# Altium PCB PCB_编码器小板_2025-08-08.pcbdoc
Units mil, origin at the board's own origin, x right, y up, seen from the top; angles counter-clockwise.
Board outline 1520 x 1535 mil, 2 copper layers (Top Layer, Bottom Layer); 4 components, 11 nets, 16 pads, 6 vias.
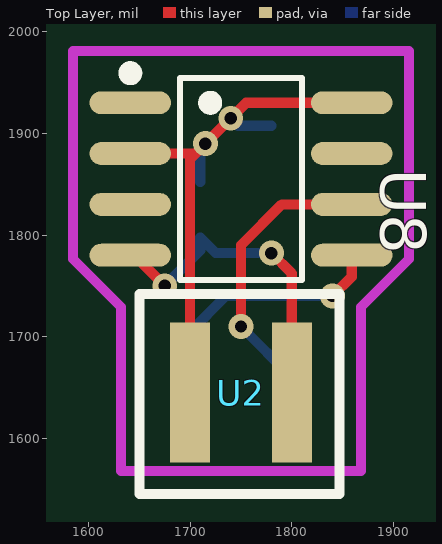
[diagram p0: Top Layer view]
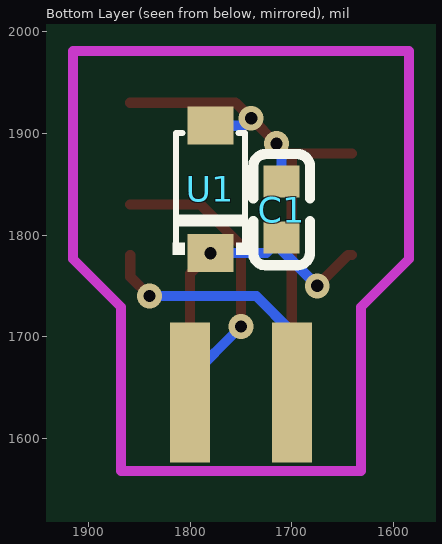
[diagram p1: Bottom Layer view, seen from below]

## Layer stack, top to bottom
Top Layer: signal copper (thickness not stored)
Dielectric: dielectric 12.6, FR-4, Dk 4.8
Bottom Layer: signal copper (thickness not stored)

## Board outline
2520,1000 1000,1000 1000,2535 2520,2535

## Components (designator, comment, footprint, x,y, rotation, side; value= is the part's Value field where it differs from the comment)
C1 "0.1u" C0603 1710,1825 r270 bottom
U1 "BZT52C6V2W" SOD-123_L2.8-W1.6-LS3.7-RD 1780,1845 r270 bottom
U2 "4PIN母排" 4PIN 1750,1645 r90 top
U8 "MT6816CT-AKD" SOP-8_L5.0-W4.0-P1.27-LS6.0-BL 1750,1855.24 r270 top

## Footprints (in the part's own frame and the unit in brackets; to place one, negate y for a bottom-side part, rotate by r counter-clockwise, add the part's x,y. Pads: shape width x height; smd on the part's side, far side on the other; paste and mask are expansions set on the pad)
4PIN [mm]
  rect 3.5x1 smd paste+0 mask+0.051: 1(0,1.27) 2(0,-1.27)
  rect 3.5x1 smd far side paste+0 mask+0.051: 3(0,-1.27) 4(0,1.27)
  silkscreen extent -2.54,-2.46 2.46,2.54
C0603 [mm]
  rect 0.8x0.9 smd paste+0 mask+0.051: 1(0.7,0) 2(-0.7,0)
  silkscreen extent -1.39,-0.71 1.39,0.71
SOD-123_L2.8-W1.6-LS3.7-RD [mm]
  rect 0.95x1.15 smd paste+0 mask+0.051: 1(1.593,0) 2(-1.593,0)
  silkscreen extent -1.41,-0.94 1.63,0.94
SOP-8_L5.0-W4.0-P1.27-LS6.0-BL [mil]
  oval 22.6x80.14 smd paste+0 mask+2: 1(-75,-108.97) 2(-25,-108.97) 3(25,-108.97) 4(75,-108.97) 5(75,108.97) 6(25,108.97) 7(-25,108.97) 8(-75,108.97)
  silkscreen extent -110,-115 99,60

## Via types
v1: diameter 24.41, hole 12.2, Top Layer to Bottom Layer, tented both sides, 6 vias

## Nets (pads, with @x,y where several pads share a name; then routed paths per layer and width w, separated by ;. In a path a pad name is that pad's centre, name@x,y a point inside that pad or via, vN(x,y) a via of type N, cw(c..) or ccw(c..) an arc to the next point about the centre after c; other vN are vias at no path point)
A: U2.3 U8.6 | length 291.3
  Top Layer w10: v1(1750,1710) 1750,1790 1790.24,1830.24 U8.6
  Bottom Layer w10: v1(1750,1710) 1800,1660 U2.3
B: U2.4 U8.5 | length 262.6
  Top Layer w10: v1(1840,1740) 1858.97,1758.97 U8.5
  Bottom Layer w10: U2.4 1700,1705 1735,1740 v1(1840,1740)
GND: C1.2 U1.2 U2.1 U8.2 U8.8 | length 572.4
  Top Layer w10: U8.2 1705.24,1880.24 v1(1715,1890) ; U2.1 1700,1875 v1(1715,1890) ; U8.8 1755.24,1930.24 v1(1740,1915) v1(1715,1890)
  Bottom Layer w10: C1.2 1710,1885 v1(1715,1890) ; v1(1740,1915) 1747.31,1907.69 U1.2
S$718: 
S$722: 
S$726: 
S$744: 
S$764: 
S$768: 
S$772: 
VCC: C1.1 U1.1 U2.2 U8.4 | length 330.3
  Top Layer w10: U8.4 1644.76,1780.24 v1(1675,1750) ; v1(1780,1782.31) 1800,1762.31 U2.2
  Bottom Layer w10: v1(1675,1750) 1710,1785 C1.1 1725.13,1782.31 v1(1780,1782.31)
pads on no net: U8.1 U8.3 U8.7

## Polygon pours and split planes (outlines as drawn)
GND on Top Layer (solid): 1500,2030 1995,2030 2000,2035 2000,1545 1955,1500 1535,1500 1525,1510
GND on Bottom Layer (solid): 1505,2025 2020,2025 2020,1535 1990,1505 1555,1505 1510,1550